# Altium PCB ArduinoDevBoard-v2-fix-rules.PcbDoc
Units mm, origin at the board's own origin, x right, y up, seen from the top; angles counter-clockwise.
Board outline 100 x 70 mm, 2 copper layers (Top Layer, Bottom Layer); 39 components, 34 nets, 143 pads, 0 vias.
Unrouted connection lines stored in the file: 5.
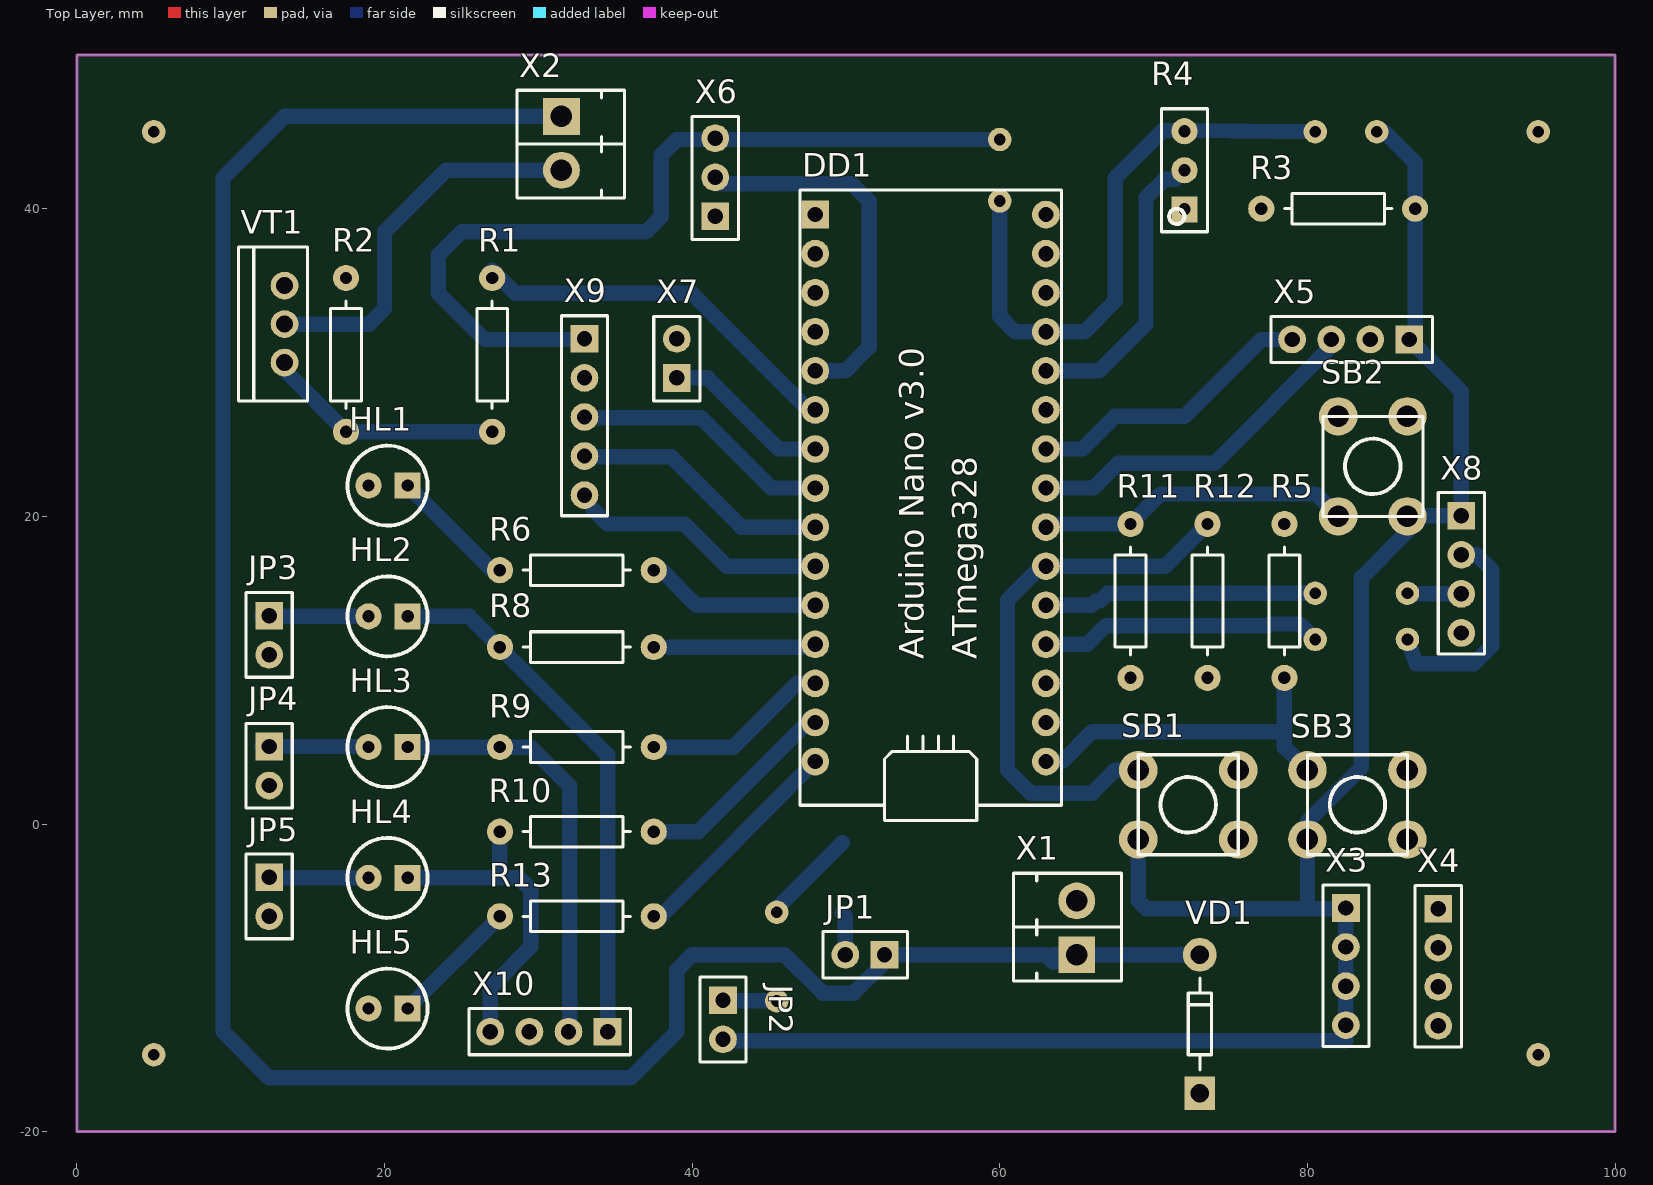
[diagram p0: Top Layer view]
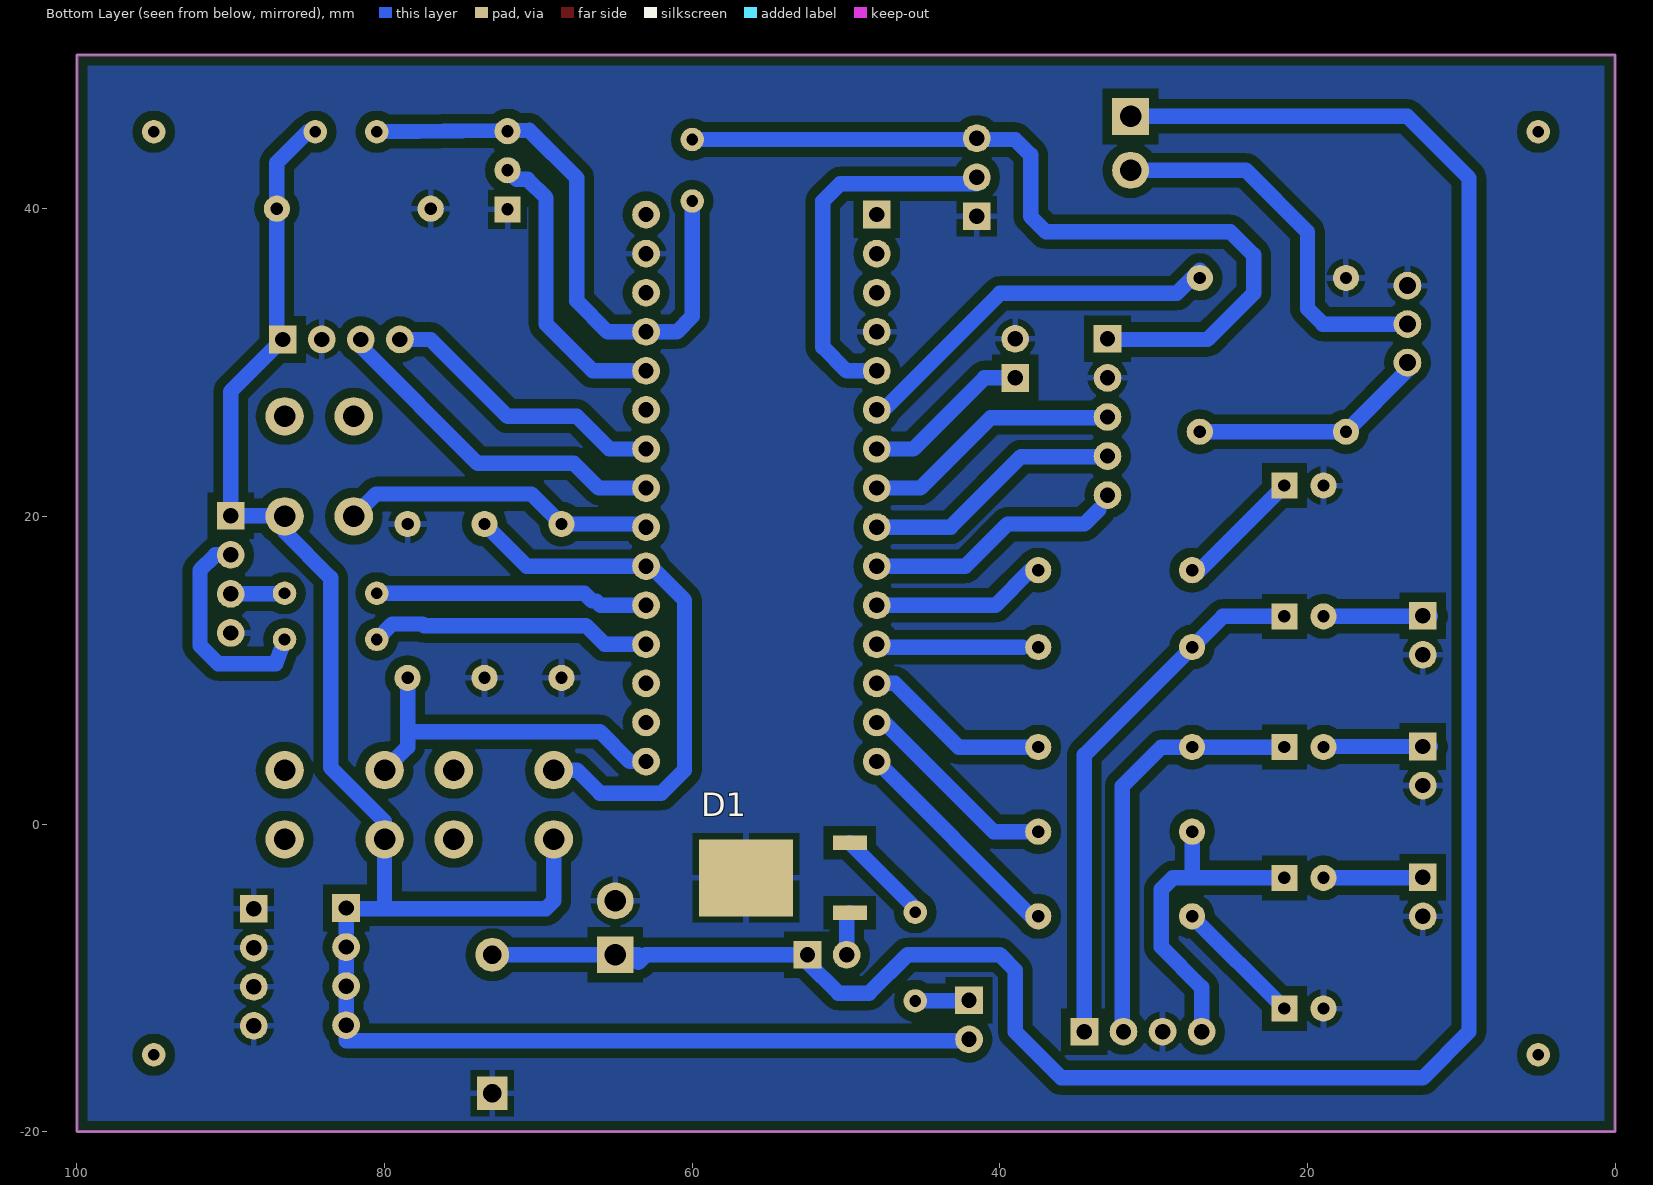
[diagram p1: Bottom Layer view, seen from below]
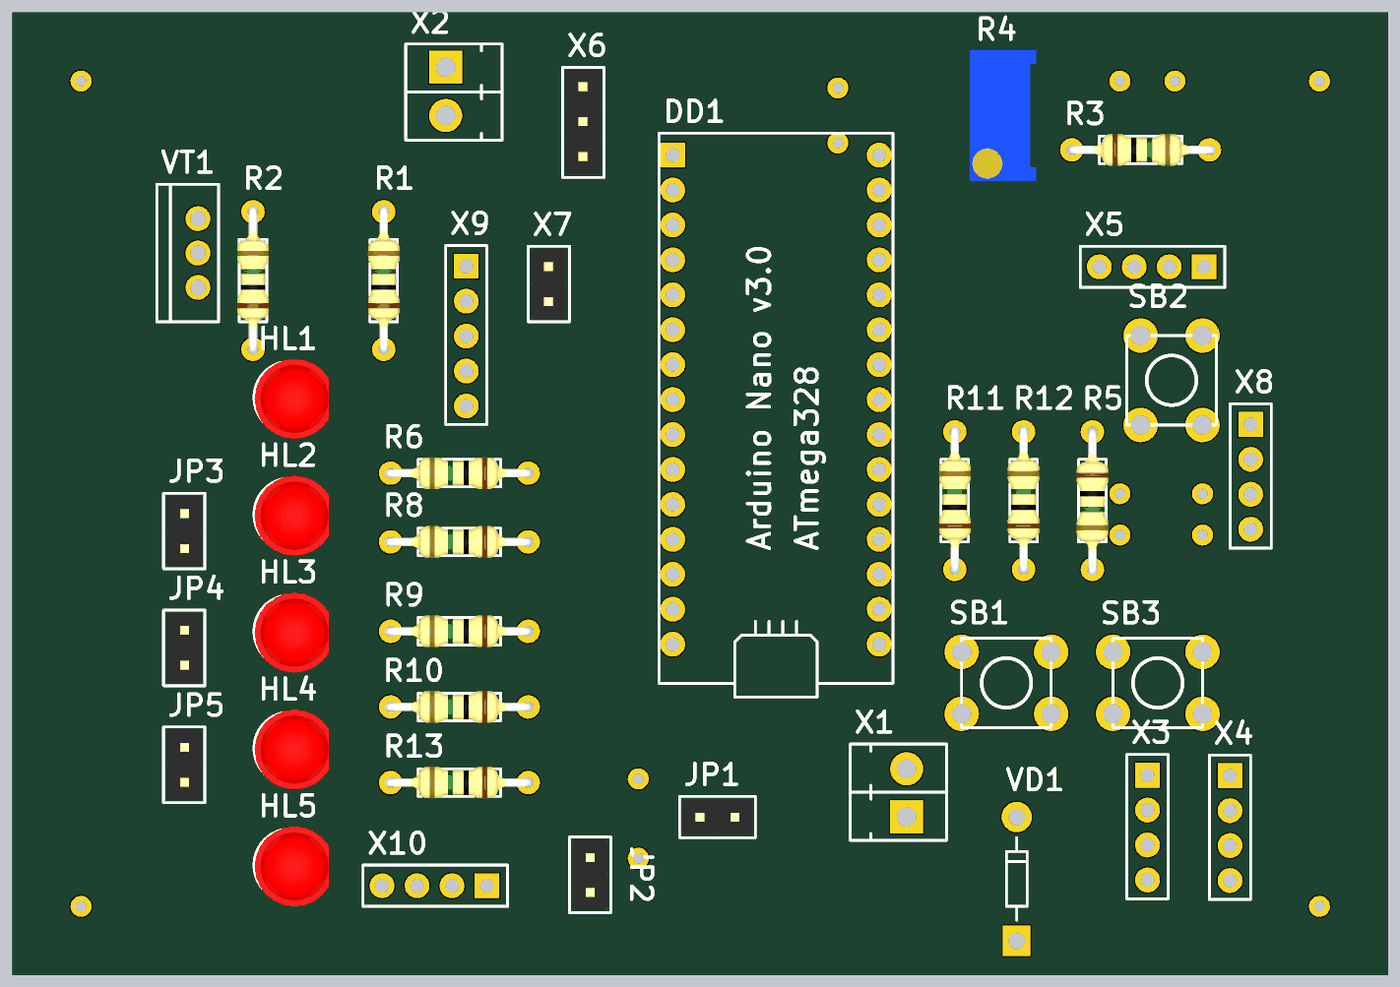
[diagram p2: 3D render of the assembled board from above, using the file's embedded part models]

## Layer stack, top to bottom
Top Solder: solder mask 0.0102, Solder Resist, Dk 3.5
Top Layer: signal copper 0.0356
Dielectric 1: dielectric 0.32, FR-4, Dk 4.8
Bottom Layer: signal copper 0.0356
Bottom Solder: solder mask 0.0102, Solder Resist, Dk 3.5

## Board outline
0,-20 100,-20 100,50 0,50

## Design rules (kind name [scope] priority, off if disabled: settings)
Clearance [All] p1: gap=0.6 ignorepadtopadclearanceinfootprint=FALSE
PolygonConnect [All] p1: connectstyle=Relief reliefconductorwidth=0.4 reliefentries=4 polygonreliefangle="90 Angle" airgapwidth=0.4
RoutingVias [All] p1: holewidth=0.711 width=1.27 viastyle="Through Hole" minholewidth=0.711 minwidth=1.27 maxholewidth=0.711 maxwidth=1.27
SolderMaskExpansion [All] p1: expansion=0.102
Width [All] p1: maxlimit=1.2 minlimit=0.6 preferedwidth=1 toplayer_maxwidth=1 bottomlayer_minwidth=0.8 minimp=50.000000 maximp=50.000000 favimp=50.000000
30 further rules are at their usual default settings.

## Components (designator, comment, footprint, x,y, rotation, side; value= is the part's Value field where it differs from the comment)
D1 "L78M05" D-PAK 54.1,-3.5 r0 bottom
DD1 "ADUINO-NANO-V3.0-328" ARDUINO_NANO_V3.0 48,39.72 r0 top
HL1 "*" "Led Diode 5mm" 21.5,22 r180 top
HL2 "*" "Led Diode 5mm" 21.5,13.5 r180 top
HL3 "*" "Led Diode 5mm" 21.5,5 r180 top
HL4 "*" "Led Diode 5mm" 21.5,-3.5 r180 top
HL5 "*" "Led Diode 5mm" 21.5,-12 r180 top
JP1 "Jumper" PLS-2 52.5,-8.5 r180 top
JP2 "Jumper" PLS-2 42,-11.46 r270 top
JP3 "Jumper" PLS-2 12.5,13.54 r270 top
JP4 "Jumper" PLS-2 12.5,5.04 r270 top
JP5 "Jumper" PLS-2 12.5,-3.46 r270 top
R1 "100R" Resistor-0.25W 27,25.5 r90 top
R2 "1k" Resistor-0.25W 17.5,25.5 r90 top
R3 "4.7K" Resistor-0.25W 77,40 r0 top
R4 "1k" 3296W_Resistor 72,42.5 r90 top
R5 "10k" Resistor-0.25W 78.5,19.5 r270 top
R6 "100R" Resistor-0.25W 37.5,16.5 r180 top value=240R
R8 "100R" Resistor-0.25W 37.5,11.5 r180 top value=240R
R9 "100R" Resistor-0.25W 37.5,5 r180 top value=240R
R10 "100R" Resistor-0.25W 37.5,-0.5 r180 top value=240R
R11 "10k" Resistor-0.25W 68.5,9.5 r90 top
R12 "10k" Resistor-0.25W 73.5,9.5 r90 top
R13 "100R" Resistor-0.25W 37.5,-6 r180 top value=240R
SB1 "*" KLS7-TS6601-5.0-180 69,3.5 r0 top
SB2 "*" KLS7-TS6601-5.0-180 82,20 r90 top
SB3 "*" KLS7-TS6601-5.0-180 80,3.5 r0 top
VD1 "1N4007" "Diode (DO41)" 73,-13 r90 top
VT1 "TIP122" TO220 13.5,32.5 r270 top
X1 "15EDGVC-3.5-2P" 15EDGVC-3.5-2P 65,-8.5 r90 top
X2 "15EDGVC-3.5-2P" 15EDGVC-3.5-2P 31.5,46 r270 top
X3 "PLS-4" PLS-4 82.5,-5.46 r270 top
X4 "PLS-4" PLS-4 88.5,-5.5 r270 top
X5 "PLS-4" PLS-4 86.62,31.5 r180 top
X6 "15EDGVC-3.5-3P" PLS-3 41.5,39.5 r90 top
X7 "*" PLS-2 39,29 r90 top
X8 "*" PLS-4 90,20.04 r270 top
X9 "*" PLS-5 33,31.54 r270 top
X10 "*" PLS-4 34.5,-13.5 r180 top

## Footprints (in the part's own frame and the unit in brackets; to place one, negate y for a bottom-side part, rotate by r counter-clockwise, add the part's x,y. Pads: shape width x height; smd on the part's side, far side on the other; paste and mask are expansions set on the pad)
15EDGVC-3.5-2P [mm]
  rect 2.4x2.4 hole 1.4 unplated: 1(0,0)
  round 2.4 hole 1.4: 2(3.5,0)
  silkscreen extent -1.7,-2.9 5.3,4.1
3296W_Resistor [mm]
  rect 1.7x1.7 hole 0.8: 1(-2.54,0)
  round 1.7 hole 0.8: 2(0,0) 3(2.54,0)
  silkscreen extent -4,-1.5 4,1.5, body extent -4.76,-2.4 4.77,2.4, height 11.55
ARDUINO_NANO_V3.0 [mm]
  rect 1.8x1.8 hole 1: 1(0,-0.1)
  round 1.8 hole 1: 2(0,-2.64) 3(0,-5.18) 4(0,-7.72) 5(0,-10.26) 6(0,-12.8) 7(0,-15.34) 8(0,-17.88) 9(0,-20.42) 10(0,-22.96) 11(0,-25.5) 12(0,-28.04) 13(0,-30.58) 14(0,-33.12) 15(0,-35.66) 16(15,-35.66) 17(15,-33.12) 18(15,-30.58) 19(15,-28.04) 20(15,-25.5) 21(15,-22.96) 22(15,-20.42) 23(15,-17.88) 24(15,-15.34) 25(15,-12.8) 26(15,-10.26) 27(15,-7.72) 28(15,-5.18) 29(15,-2.64) 30(15,-0.1)
  silkscreen extent -1,-39.5 16,1.5
D-PAK [mm] "TO-252AA"
  rect 2.2x0.95 smd: 1(-4.35,2.28) 2(-4.35,-2.28)
  rect 6.1x5 smd: 3(2.4,0)
  body extent -4.6,-3.25 5.3,3.25, height 2.5
"Diode (DO41)" [mm]
  rect 2.2x2 hole 1.2: 1(-4.5,0)
  round 2.2 hole 1.2: 2(4.5,0)
  silkscreen extent -3,-0.75 3,0.75
KLS7-TS6601-5.0-180 [mm]
  round 2.5 hole 1.4: 1(0,0) 2(6.5,0) 3(0,-4.5) 4(6.5,-4.5)
  silkscreen extent 0,-5.5 6.5,1
"Led Diode 5mm" [mm]
  rect 1.7x1.7 hole 0.8: 1(0,0)
  round 1.7 hole 0.8: 2(2.54,0)
  silkscreen extent -1.3,-2.6 3.9,2.6, body extent -1.5,-2.8 3.89,3, height 8.5
PLS-2 [mm]
  rect 1.8x1.8 hole 1: 1(0,0)
  round 1.8 hole 1: 2(2.54,0)
  silkscreen extent -1.5,-1.5 4,1.5, body extent -1.29,-1.25 3.79,1.29, height 8.54
PLS-3 [mm]
  rect 1.8x1.8 hole 1: 1(0,0)
  round 1.8 hole 1: 2(2.54,0) 3(5.08,0)
  silkscreen extent -1.5,-1.5 6.5,1.5, body extent -1.25,-1.25 6.37,1.29, height 8.54
PLS-4 [mm]
  rect 1.8x1.8 hole 1: 1(0,0)
  round 1.8 hole 1: 2(2.54,0) 3(5.08,0) 4(7.62,0)
  silkscreen extent -1.5,-1.5 9,1.5
PLS-5 [mm]
  rect 1.8x1.8 hole 1: 1(0,0)
  round 1.8 hole 1: 2(2.54,0) 3(5.08,0) 4(7.62,0) 5(10.16,0)
  silkscreen extent -1.5,-1.5 11.5,1.5
Resistor-0.25W [mm]
  round 1.7 hole 0.8: 1(0,0) 2(10,0)
  silkscreen extent 1.5,-1 8.5,1, body extent -0.3,-1.16 10.46,1.16, height 2.93
TO220 [mm]
  round 1.8 hole 1.1: 1(2.5,0) 2(0,0) 3(-2.5,0)
  silkscreen extent -5,-3 5,1.5

## Part data
DD1: library part ARDUINO-NANO-V3.0-328
HL1 HL2 HL3 HL4 HL5: library part Led-5mm
R1 R2 R3 R5 R6 R8 R9 R10 R11 R12 R13: library part "Resistor 0.25W", "=Power"
R4: library part 3296W, "3296", Case=3296W
SB1 SB2 SB3: library part KLS7-TS6601-5.0-180
VD1: "1A, 1000V"
VT1: "PNP Transistor"
X1 X2 X7: library part Connector-2Pin
  X1 X2: Case=15EDGVC-3.5-2P
X3 X4 X5 X8 X10: library part Connector-4Pin
  X3 X4 X5: Case=PLS-4
X6: library part Connector-3Pin, Case=15EDGVC-3.5-3P
X9: library part Connector-5Pin

## Free pads (board coordinates)
  round 1.524 hole 0.762: 2(45.5,-11.5) 3(45.5,-5.735) 8(95,45) 9(5,45) 12(95,-15) 13(5,-15) 14(60,44.5) 15(60,40.5) 18(80.5,45) 19(84.5,45) 20(80.5,15) 21(86.5,15) 23(80.5,12) 24(86.5,12)

## Nets (pads, with @x,y where several pads share a name; then routed paths per layer and width w, separated by ;. In a path a pad name is that pad's centre, name@x,y a point inside that pad or via, vN(x,y) a via of type N, cw(c..) or ccw(c..) an arc to the next point about the centre after c; other vN are vias at no path point)
+5V: DD1.27 JP2.2 pad.14 pad.15 pad.18 pad.19 R3.2 R4.3 SB1.3 SB2.3 SB3.3 X3.1 X3.2 X3.3 X3.4 X5.1 X6.3 X8.1 X9.1 | length 218.7
  Bottom Layer w1: X9.1@33,31.5 26.5,31.5 25.5,32.5 23.5,34.5 23.5,37 25,38.5 37,38.5 38,39.5 38,43.5 39,44.5 pad.14 ; JP2.2@42,-14.08 82.5,-14.08 X3.4 X3.3 X3.2 82.5,-5.5 80,-5.5 ; pad.15 60,33 61,32 DD1.27 65.5,32 67.5,34 67.5,42 70.6,45.1 72.001,45.082 pad.18 ; SB1.3 69,-5 69.5,-5.5 80,-5.5 ; pad.19@85,45 87,43 R3.2 87,31.88 X5.1 ; X5.1@86.5,31.62 X5.1 ; X8.1 86.54,20.04 SB2.3 86.5,19 83.5,16 83.5,3.677 80,0.177 80,-5.5 ; 90,21.04 90,28.12 X5.1
+12V: JP1.1 VD1.2 X1.1 X2.1 | length 151.6
  Bottom Layer w1: X2.1 13.5,46 9.5,42 9.5,-13.5 12.5,-16.5 36,-16.5 39,-13.5 39,-9.5 40,-8.5 46,-8.5 48.5,-11 50.5,-11 JP1.1@52.5,-9 ; JP1.1 63,-8.5 63.5,-9 ; 63.5,-8.5 VD1.2
GND: D1.3 DD1.4 DD1.29 HL1.2 HL5.2 JP3.2 JP4.2 JP5.2 R2.2 R3.1 R4.1 R5.1 R11.1 R12.1 VD1.1 VT1.3 X1.2 X4.1 X4.2 X4.3 X4.4 X5.2 X6.1 X7.2 X8.4 X9.2 X10.3
NetD1_1: D1.1 JP1.2 | length 2.8
  Bottom Layer w1: D1.1 49.96,-5.99 JP1.2
NetD1_2: D1.2 JP2.1 pad.2 pad.3 | length 8.8
  Bottom Layer w1: 43,-11.5 pad.2 ; pad.3 45.5,-5.47 D1.2
NetDD1_5: DD1.5 X6.2 | length 24.1
  Bottom Layer w1: X6.2@41.5,41.62 50.38,41.62 51.5,40.5 51.5,31 49.96,29.46 DD1.5
NetDD1_6: DD1.6 R1.2 | length 24.9
  Bottom Layer w1: R1.2@27,36 28.5,34.5 40,34.5 DD1.6@48,26.5
NetDD1_7: DD1.7 X7.1 | length 10.9
  Bottom Layer w1: X7.1 41,29 45.62,24.38 DD1.7
NetDD1_8: DD1.8 X9.3 | length 16.9
  Bottom Layer w1: X9.3@33,26.42 40.58,26.42 45.16,21.84 DD1.8
NetDD1_9: DD1.9 X9.4 | length 16.9
  Bottom Layer w1: X9.4@33,23.88 38.62,23.88 43.2,19.3 DD1.9
NetDD1_10: DD1.10 X9.5 | length 15.9
  Bottom Layer w1: 33.58,20.42 34.5,19.5 39.5,19.5 42.24,16.76 DD1.10
NetDD1_11: DD1.11 R6.1 | length 10.9
  Bottom Layer w1: R6.1@38,16.5 40.28,14.22 DD1.11
NetDD1_12: DD1.12 R8.1 | length 9.6
  Bottom Layer w1: 38.5,11.5 47.82,11.5 DD1.12
NetDD1_13: DD1.13 R9.1 | length 12.2
  Bottom Layer w1: R9.1 42.677,5 46.817,9.14 DD1.13
NetDD1_14: DD1.14 R10.1 | length 13.3
  Bottom Layer w1: R10.1 40.409,-0.5 DD1.14@47.755,6.845
NetDD1_15: DD1.15 R13.1 | length 14.2
  Bottom Layer w1: R13.1@37.97,-5.97 DD1.15
NetDD1_16: DD1.16 R5.2 SB3.1 | length 22.4
  Bottom Layer w1: DD1.16 64.06,4.06 66,6 75.5,6 78,6 ; R5.2 78.5,5 SB3.1
NetDD1_19: DD1.19 pad.23 pad.24 X8.2 | length 32.9
  Bottom Layer w1: DD1.19 65.68,11.68 66.9,12.9 77.425,12.9 77.525,13 79.5,13 pad.23 ; pad.24 87.08,10.42 90.828,10.42 92,11.592 92,13.248 92,16.5 91,17.5 X8.2
NetDD1_20: DD1.20 pad.20 pad.21 X8.3 | length 21.7
  Bottom Layer w1: DD1.20@63.28,14.5 DD1.20 65.957,14.22 66.237,14.5 66.5,14.5 67,15 pad.20 ; pad.21 86.54,14.96 X8.3
NetDD1_21: DD1.21 R12.2 SB1.1 | length 35.8
  Bottom Layer w1: SB1.1 67.5,3.5 66,2 62,2 60.5,3.5 60.5,14.548 62.712,16.76 DD1.21 70.76,16.76 R12.2
NetDD1_22: DD1.22 R11.2 SB2.1 | length 20.5
  Bottom Layer w1: DD1.22 63.2,19.5 R11.2 70.45,21.45 80.55,21.45 SB2.1
NetDD1_23: DD1.23 X5.3 | length 22.8
  Bottom Layer w1: DD1.23 66.082,21.84 67.692,23.45 73.95,23.45 81.54,31.04 X5.3
NetDD1_24: DD1.24 X5.4 | length 18.9
  Bottom Layer w1: DD1.24 65.38,24.38 67.5,26.5 72,26.5 77,31.5 X5.4
NetDD1_26: DD1.26 R4.2 | length 19.2
  Bottom Layer w1: DD1.26 66.46,29.46 69.5,32.5 69.5,40.716 70.694,41.91 71.41,41.91 R4.2
NetHL1_1: HL1.1 R6.2 | length 8.3
  Bottom Layer w1: HL1.1 27,16.5 R6.2
NetHL2_1: HL2.1 R8.2 X10.1 | length 34.2
  Bottom Layer w1: HL2.1@22,13.5 25.5,13.5 34.5,4.5 X10.1
NetHL2_2: HL2.2 JP3.1 | length 7
  Bottom Layer w1: JP3.1@12,13.5 HL2.2
NetHL3_1: HL3.1 R9.2 X10.2 | length 27.6
  Bottom Layer w1: HL3.1 R9.2 29.5,5 32.05,2.45 32.05,-13.41 X10.2
NetHL3_2: HL3.2 JP4.1 | length 7
  Bottom Layer w1: JP4.1@12,5.04 JP4.1 HL3.2@18.96,5.04
NetHL4_1: HL4.1 R10.2 X10.4 | length 21.7
  Bottom Layer w1: HL4.1 27.5,-3.5 ; X10.4 26.88,-10.62 29.5,-8 29.5,-4.242 28.758,-3.5 27.5,-3.5 ; R10.2 27.5,-3.5
NetHL4_2: HL4.2 JP5.1 | length 6.5
  Bottom Layer w1: JP5.1@12.5,-3.5 HL4.2
NetHL5_1: HL5.1 R13.2 | length 8.5
  Bottom Layer w1: HL5.1 R13.2
NetR1_1: R1.1 R2.1 VT1.1 | length 14.7
  Bottom Layer w1: VT1.1 13.5,29.5 R2.1 ; R2.1@18,25.5 R1.1@26.5,25.5
NetVT1_C: VT1.2 X2.2 | length 25.1
  Bottom Layer w1: VT1.2 19,32.5 20,33.5 20,38.5 24,42.5 X2.2
pads on no net: DD1.1 DD1.2 DD1.3 DD1.17 DD1.18 DD1.25 DD1.28 DD1.30 SB1.2 SB1.4 SB2.2 SB2.4 SB3.2 SB3.4

## Polygon pours and split planes (outlines as drawn)
GND on Bottom Layer "Bottom Layer-No Net" (solid, pour order 56): 0,50 100,50 100,-20 0,-20
GND on Bottom Layer "GND" (solid, pour order 14): 0,50 0,-19.5

## Keep-outs
Keep-Out Layer:
  the board outline again, w0.2

## Silkscreen, mask and mechanical layers (free items; w line width, h text height)
Border:
  the board outline again, w0.2

## Dimensions
-1,-20 to 0,50 on Size
0,50 to 100,50 on Size

## Text inside footprints (layer, text, board x,y; h text height)
DD1: Top Overlay "ATmega328" at 58.5,10.72 h1.59 r90; Top Overlay "Arduino Nano v3.0" at 55.039,10.72 h1.59 r90